# EAGLE board SuperTester-v05 (EAGLE 6.4)
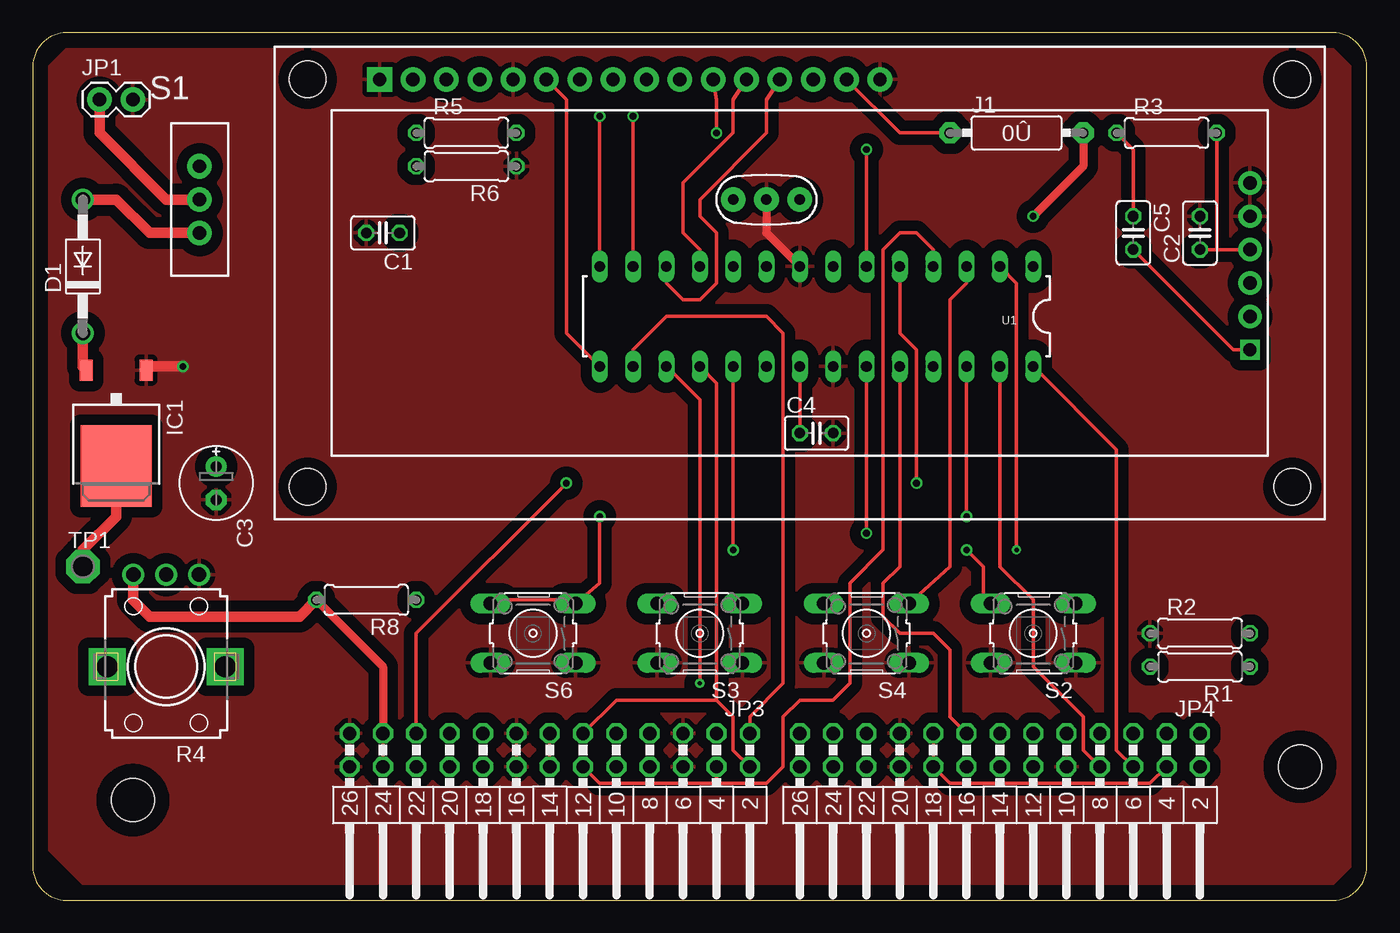
[diagram p0: board, top side]
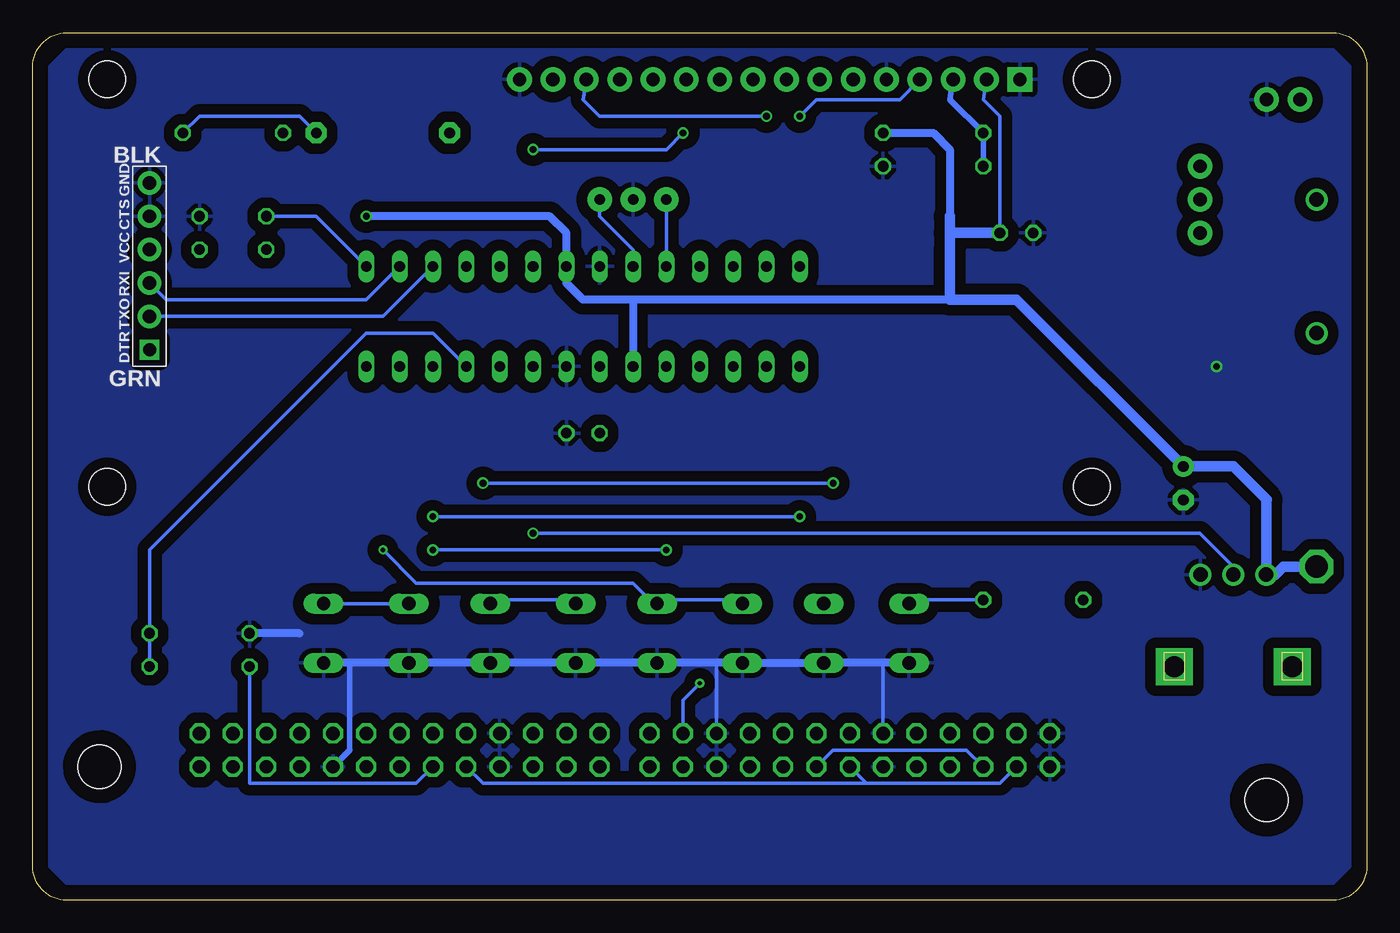
[diagram p1: board, bottom side, seen from below]

Size 101.6 x 66.04 mm. Coordinates in mm from the lower left corner, seen from the top.
Outline: 99.06,66.04 2.54,66.04 arc90 0,63.5 0,2.54 arc90 2.54,0 99.06,0 arc90 101.6,2.54 101.6,63.5 arc90 99.06,66.04
Copper layers (1*16): Top 0.0356mm / dielectric 1.5011mm / Bottom 0.0356mm
Design rules "LaenPCBOrder *": minimum track width 10mil, minimum drill 13mil, track to track 15mil, track to pad 10mil, pad to pad 10mil, via to via 10mil, smd to smd 10mil, copper to edge 15mil, drill to drill 10mil, minimum pad ring 7mil, minimum via ring 7mil, stop-mask expansion 4mil, vias tented up to drill 0mil, thermal gap 15mil
Net classes: 0 default: width 0.152 mm, clearance 0.152 mm; 1 SUPPLY: width 0.61 mm, clearance 0.254 mm

## Footprints (pad centres in the part's own frame; a part is rotated, then mirrored left to right if it is on the bottom)
C025-025X050 = drill 0.813 octagon: 1 -1.27,0; 2 1.27,0
E2,5-6E = drill 0.813 pad 1.575: + -1.27,0 | drill 0.813 pad 1.575 octagon: - 1.27,0
DO41-10 = drill 1.118: A 5.08,0; C -5.08,0
DPACK = smd 1 x 1.6: 1 -2.28,-4.8; 3 2.28,-4.8 | smd 5.4 x 6.2: 2 0,2.5
0R/10 = drill 0.813 pad 1.6 octagon: 1 -5.08,0; 2 5.08,0
1X02 = drill 1.016 pad 1.88: 1 0,0; 2 2.54,0
FTDI_DEVICE_SIDE = drill 1 square: P$1 -6.35,0 | drill 1.016 pad 1.778: P$2 -3.81,0; P$3 -1.27,0; P$4 1.27,0; P$5 3.81,0; P$6 6.35,0
MA13-2W = drill 1.016 octagon: 1 -15.24,-1.27; 2 -15.24,1.27; 3 -12.7,-1.27; 4 -12.7,1.27; 5 -10.16,-1.27; 6 -10.16,1.27; 7 -7.62,-1.27; 8 -7.62,1.27; 9 -5.08,-1.27; 10 -5.08,1.27; 11 -2.54,-1.27; 12 -2.54,1.27; 13 0,-1.27; 14 0,1.27; 15 2.54,-1.27; 16 2.54,1.27; 17 5.08,-1.27; 18 5.08,1.27; 19 7.62,-1.27; 20 7.62,1.27; 21 10.16,-1.27; 22 10.16,1.27; 23 12.7,-1.27; 24 12.7,1.27; 25 15.24,-1.27; 26 15.24,1.27
0207/7 = drill 0.813 octagon: 1 -3.81,0; 2 3.81,0
EVUF = drill 1.1 pad 1.676: 1 -2.5,-7; 2 0,-7; 3 2.5,-7 | drill 1.6 pad 2.8 square: M1 4.5,0; M2 -4.5,0
SWITCH-SPDT = drill 1.016 pad 1.88: 1 0,2.54; 2 0,0; 3 0,-2.54
B3F-10XX = drill 1.016 long: 1 -3.251,2.261; 2 3.251,2.261; 3 -3.251,-2.261; 4 3.251,-2.261
STAND-OFF = hole 3.302: 0,0
P1-17 = drill 1.702 pad 2.54 octagon: TP 0,0
DIL28-3 = drill 0.813 long: 1 -16.51,-3.81; 2 -13.97,-3.81; 3 -11.43,-3.81; 4 -8.89,-3.81; 5 -6.35,-3.81; 6 -3.81,-3.81; 7 -1.27,-3.81; 8 1.27,-3.81; 9 3.81,-3.81; 10 6.35,-3.81; 11 8.89,-3.81; 12 11.43,-3.81; 13 13.97,-3.81; 14 16.51,-3.81; 15 16.51,3.81; 16 13.97,3.81; 17 11.43,3.81; 18 8.89,3.81; 19 6.35,3.81; 20 3.81,3.81; 21 1.27,3.81; 22 -1.27,3.81; 23 -3.81,3.81; 24 -6.35,3.81; 25 -8.89,3.81; 26 -11.43,3.81; 27 -13.97,3.81; 28 -16.51,3.81
LCD-16X2 = drill 1.016 pad 1.88 square: 1 -32,15.5 | drill 1.016 pad 1.88: 2 -29.46,15.5; 3 -26.92,15.5; 4 -24.38,15.5; 5 -21.84,15.5; 6 -19.3,15.5; 7 -16.76,15.5; 8 -14.22,15.5; 9 -11.68,15.5; 10 -9.14,15.5; 11 -6.6,15.5; 12 -4.06,15.5; 13 -1.52,15.5; 14 1.02,15.5; 15 3.56,15.5; 16 6.1,15.5 | hole 2.8: -37.5,15.5; -37.5,-15.5; 37.5,15.5; 37.5,-15.5
RESONATOR-PTH = drill 0.8 pad 1.88: 1 -2.54,0; 2 0,0; 3 2.54,0

## Placement (x,y rotation side)
C1  100nF  [C025-025X050]  26.67,50.8 180 top
C2  100nF  [C025-025X050]  88.9,50.8 90 top
C3  10uF  [E2,5-6E]  13.97,31.75 270 top
C4  100nF  [C025-025X050]  59.69,35.56 0 top
C5  100nF  [C025-025X050]  83.82,50.8 270 top
D1  1N4004  [DO41-10]  3.81,48.26 90 top
FRAME1  FRAME-LETTER  [CREATIVE_COMMONS]  27.94,69.85 0 top  (outside the outline)
IC1  MC33269D-5.0  [DPACK]  6.35,35.56 180 top
J1  0  [0R/10]  74.93,58.42 0 top
JP1  1X2 Header  [1X02]  5.08,60.96 0 top
JP2  FTDI_DEVICE  [FTDI_DEVICE_SIDE]  92.71,48.26 90 bottom
JP3  2X13 Rght Angle Hdr  [MA13-2W]  39.37,11.43 180 top
JP4  2X13 Rght Angle Hdr  [MA13-2W]  73.66,11.43 180 top
R1  24K  [0207/7]  88.9,17.78 180 top
R2  1K  [0207/7]  88.9,20.32 0 top
R3  10K  [0207/7]  86.36,58.42 0 top
R4  10K  [EVUF]  10.16,17.78 180 top
R5  2.4K  [0207/7]  33.02,58.42 0 top
R6  510  [0207/7]  33.02,55.88 180 top
R8  10K  [0207/7]  25.4,22.86 180 top
S1  POWER  [SWITCH-SPDT]  12.7,53.34 0 top
S2  B3F-1070  [B3F-10XX]  76.2,20.32 180 top
S3  B3F-1070  [B3F-10XX]  50.8,20.32 180 top
S4  B3F-1070  [B3F-10XX]  63.5,20.32 180 top
S6  B3F-1070  [B3F-10XX]  38.1,20.32 180 top
STANDOFF1  STAND-OFF  [STAND-OFF]  7.62,7.62 0 top
STANDOFF2  STAND-OFF  [STAND-OFF]  96.52,10.16 0 top
TP1  TPPAD1-17  [P1-17]  3.81,25.4 0 top
U1  ATMEGA328P_PDIP  [DIL28-3]  59.69,44.45 180 top
U2  LCD-16X2SILK  [LCD-16X2]  58.42,46.99 0 top
Y1  16MHz  [RESONATOR-PTH]  55.88,53.34 180 top

## Library data of the parts
C1 C2 C4 C5 = resistor; PARTNO: SR295E104MAR
C3 = resistor; PARTNO: TAP106M025SCS
D1 = diode; PARTNO: 1N4004GP-E3/54
FRAME1 = SparkFun-Aesthetics
IC1 = linear; PARTNO: MC33269DTRK-5.0G
J1 = jumper
JP1 = SparkFun-Connectors; PARTNO: 640456-2
JP2 = SparkFun-Connectors; PARTNO: 826926-6
JP3 JP4 = con-lstb; OC_FARNELL: unknown; OC_NEWARK: unknown; PARTNO: 1-826634-3
R1 = resistor; PARTNO: CFR-12JB-52-24K
R2 = resistor; PARTNO: CFR-12JB-52-1K
R3 R8 = resistor; PARTNO: CFR-12JB-52-10K
R4 = pot; PARTNO: EVU-F3AF30B14
R5 = resistor; PARTNO: CFR-12JB-52-2K4
R6 = resistor; PARTNO: CFR-12JB-52-510R
S1 = SparkFun-Electromechanical; PARTNO: EG1218
S2-S4 S6 = switch-omron; MPN: B3F-1000; OC_FARNELL: 176432; OC_NEWARK: 36M3542; PARTNO: B3F-1070
STANDOFF1 STANDOFF2 = SparkFun-Electromechanical
TP1 = testpad
U1 = SparkFun-DigitalIC; PARTNO: A000048
U2 = SparkFun-Displays; PARTNO: LCM-S01602DSF/A
Y1 = SparkFun-FreqCtrl; PARTNO: CSTLS16M0X53-B0

## Nets
ACT1: JP2.P$3 S3.3 S3.4 U1.2
ACT2: JP2.P$2 S4.3 S4.4 U1.3
AIN0: R4.2 U1.23
AIN1: JP4.15 U1.24
AIN2: R1.1 R2.2 U1.25
AREF: C4.1 U1.21
BRIGHT: J1.1 U2.15
CON: R5.1 R6.2 U2.3
D4: U1.6 U2.11
D5: U1.11 U2.12
D6: U1.12 U2.13
D7: U1.13 U2.14
DIN1: JP3.4 JP3.12 JP3.22 U1.4
DIN2: JP3.2 JP3.11 U1.18
EN: U1.15 U2.6
GND: C1.2 C2.2 C3.- C4.2 IC1.1 JP1.2 JP2.P$5 JP2.P$6 JP3.5 JP3.6 JP3.15 JP3.16 JP3.25 JP3.26 JP4.10 JP4.19 JP4.20 R2.1 R4.1 R6.1 S2.1 S2.2 S3.1 S3.2 S4.1 S4.2 S6.1 S6.2 U1.8 U1.22 U2.1 U2.5 U2.16 Y1.2
NEXT: S2.3 S2.4 U1.19
PREV: R8.1 S6.3 S6.4 U1.26
PWMOUT: JP3.21 U1.5
RESET: C5.1 R3.1 U1.1
RS: U1.14 U2.4
RST#: C5.2 JP2.P$1
SCALED_AIN: JP4.16 R1.2
SCL: JP4.6 U1.28
SDA: JP4.8 U1.27
SPIKE_FWD: JP3.1 U1.16
SPIKE_REV: JP3.3 U1.17
V_BATT: JP1.1 S1.2
VB: D1.A S1.3
VCC: C1.1 C2.1 C3.+ IC1.2 J1.2 JP2.P$4 JP3.13 JP3.14 JP3.23 JP3.24 JP4.4 JP4.17 JP4.18 R3.2 R4.3 R5.2 R8.2 TP1.TP U1.7 U1.20 U2.2
VIN: D1.C IC1.3
XTAL1: U1.9 Y1.1
XTAL2: U1.10 Y1.3

## Tracks (layer width: path | path; a pad name or v marks a point on that pad's centre or on a via)
ACT1  (via drill 0.33)
  Top 0.254: U1.2 74.93,46.99 v74.93,26.67
  Bottom 0.254: U1.2 76.2,45.72 91.44,45.72 JP2.P$3 | S3.4 48.26,22.86 53.34,22.86 S3.3 54.61,22.86 55.88,24.13 72.39,24.13 v74.93,26.67
ACT2
  Top 0.254: S4.3 69.85,25.4 69.85,45.72 71.12,46.99 U1.3
  Bottom 0.254: U1.3 74.93,44.45 JP2.P$2 | S4.4 60.96,22.86 66.04,22.86 S4.3
AIN0  (via drill 0.51)
  Top 0.254: v63.5,27.94 U1.23
  Bottom 0.254: R4.2 10.16,25.4 12.7,27.94 v63.5,27.94
AIN1
  Top 0.254: U1.24 66.04,25.4 64.77,24.13 64.77,21.59 66.04,20.32 68.58,20.32 69.85,19.05 69.85,13.97 JP4.15
AIN2
  Bottom 0.254: U1.25 71.12,43.18 76.2,43.18 92.71,26.67 R2.2 R1.1
AREF
  Top 0.254: U1.21 C4.1
BRIGHT
  Top 0.254: 62.23,62.23 U2.15 66.04,58.42 J1.1
CON
  Bottom 0.406: R6.2 R5.1 31.75,60.96 U2.3
D4  (via drill 0.51)
  Top 0.254: U1.6 v63.5,57.15 | v52.07,58.42 52.07,60.96 U2.11
  Bottom 0.254: v63.5,57.15 53.34,57.15 v52.07,58.42
D5
  Top 0.254: U2.12 53.34,60.96 53.34,58.42 49.53,54.61 49.53,50.8 50.8,49.53 U1.11
D6
  Top 0.254: U1.12 48.26,46.99 49.53,45.72 50.8,45.72 52.07,46.99 52.07,50.8 50.8,52.07 50.8,53.34 55.88,58.42 55.88,60.96 U2.13
D7  (via drill 0.51)
  Top 0.254: U1.13 v45.72,59.69
  Bottom 0.254: v45.72,59.69 58.42,59.69 59.69,60.96 U2.14
DIN1
  Top 0.254: 52.07,8.89 55.88,8.89 57.15,10.16 57.15,13.97 58.42,15.24 60.96,15.24 62.23,16.51 62.23,24.13 64.77,26.67 64.77,49.53 66.04,50.8 67.31,50.8 68.58,49.53 U1.4 | JP3.4 52.07,8.89 | JP3.12 43.18,8.89 52.07,8.89
  Bottom 0.254: JP3.22 30.48,11.43 40.64,11.43 JP3.12
DIN2
  Top 0.254: U1.18 52.07,39.37 52.07,15.24 | 52.07,15.24 53.34,13.97 53.34,11.43 JP3.2 | JP3.11 44.45,15.24 52.07,15.24
EN
  Top 0.254: U1.15 40.64,43.18 40.64,60.96 39.37,62.23 U2.6
GND  (via drill 0.51)
  Top 0.254: JP3.15 JP3.16
  Top 0.61: U1.8 55.88,50.8 Y1.2 | IC1.1 8.91,40.64
  Top 0.813: 8.91,40.64 v11.43,40.64
  Bottom 0.254: 36.83,18.06 JP3.15 | 49.53,18.06 JP3.5
  Bottom 0.406: JP4.10 77.47,11.43 77.47,18.06
  Bottom 0.61: S6.2 36.83,18.06 S6.1 S3.2 49.53,18.06 S3.1 S4.2 S4.1 S2.2 77.47,18.06 S2.1 | 81.28,20.32 R2.1
  pour Bottom (isolate 0.813): 1.27,63.5 2.54,64.77 99.06,64.77 100.33,63.5 100.33,2.54 99.06,1.27 2.54,1.27 1.27,2.54
  pour Top (isolate 0.813): 3.81,1.27 1.27,3.81 1.27,63.5 2.54,64.77 99.06,64.77 100.33,63.5 100.33,2.54 99.06,1.27
NEXT  (via drill 0.51)
  Top 0.254: U1.19 v53.34,26.67 | v71.12,26.67 72.39,25.4 72.39,22.86 S2.4
  Bottom 0.254: S2.3 S2.4 | v71.12,26.67 v53.34,26.67
PREV  (via drill 0.51)
  Top 0.254: S6.4 35.56,22.86 40.64,22.86 S6.3 43.18,24.13 v43.18,29.21 | v71.12,29.21 U1.26
  Bottom 0.254: v43.18,29.21 v71.12,29.21 | R8.1 34.29,22.86 S6.4
PWMOUT  (via drill 0.51)
  Top 0.254: U1.5 66.04,43.18 67.31,41.91 v67.31,31.75 | v40.64,31.75 29.21,20.32 JP3.21
  Bottom 0.254: v67.31,31.75 v40.64,31.75
RESET
  Top 0.254: R3.1 83.82,57.15 C5.1
  Bottom 0.254: U1.1 80.01,52.07 C5.1
RS  (via drill 0.51)
  Top 0.254: U1.14 v43.18,59.69
  Bottom 0.254: v43.18,59.69 41.91,60.96 35.56,60.96 U2.4
RST#
  Top 0.254: C5.2 91.44,41.91 JP2.P$1
SCALED_AIN
  Bottom 0.254: JP4.16 72.39,8.89 85.09,8.89 R1.2
SCL
  Top 0.254: U1.28 82.55,34.29 82.55,11.43 JP4.6
SDA
  Top 0.254: U1.27 73.66,25.4 76.2,22.86 76.2,17.78 80.01,13.97 80.01,11.43 JP4.8
SPIKE_FWD
  Top 0.254: JP3.1 54.61,13.97 57.15,16.51 57.15,43.18 55.88,44.45 48.26,44.45 45.72,41.91 U1.16
SPIKE_REV  (via drill 0.33)
  Top 0.254: U1.17 50.8,38.1 v50.8,16.51
  Bottom 0.254: v50.8,16.51 52.07,15.24 JP3.3
V_BATT
  Top 0.813: S1.2 10.16,53.34 5.08,58.42 JP1.1
VB
  Top 0.813: D1.A 6.35,53.34 8.89,50.8 S1.3
VCC  (via drill 0.51)
  Top 0.254: JP2.P$4 90.17,49.53 | 90.17,49.53 C2.1 | 90.17,49.53 R3.2 | JP4.17 JP4.18 69.85,8.89 85.09,8.89 JP4.4 | JP3.13 JP3.14 | JP3.23 JP3.24
  Top 0.61: R8.2 26.67,17.78 JP3.23 | J1.2 80.01,55.88 v76.2,52.07
  Top 0.813: IC1.2 6.35,29.21 3.81,26.67 TP1.TP | R8.2 20.32,21.59 8.89,21.59 7.62,22.86 7.66,22.9 R4.3
  Bottom 0.254: 7.62,24.82 R4.3 | 7.66,30.44 7.62,30.48 | J1.2 81.28,59.69 88.9,59.69 R3.2 | 38.1,8.89 JP3.14 | 38.1,8.89 27.94,8.89 JP3.24 | JP4.18 67.31,8.89 38.1,8.89 | U2.2 29.21,60.96 27.94,59.69 C1.1
  Bottom 0.61: 31.75,45.72 55.88,45.72 | 55.88,45.72 U1.20 | R5.2 33.02,58.42 31.75,57.15 31.75,52.07 | 31.75,46.99 31.75,49.53 | 55.88,45.72 59.69,45.72 60.96,46.99 U1.7 60.96,50.8 62.23,52.07 v76.2,52.07
  Bottom 0.813: 7.62,30.48 10.16,33.02 C3.+ 26.67,45.72 31.75,45.72 31.75,49.53 31.75,50.8 | TP1.TP 6.35,25.4 6.97,24.78 R4.3 7.66,30.44 | 31.75,52.07 31.75,50.8 | C1.1 31.75,50.8
VIN
  Top 0.254: 3.81,40.62 IC1.3
  Top 0.813: D1.C 3.81,40.62
XTAL1
  Bottom 0.254: Y1.1 58.42,52.07 55.88,49.53 U1.9
XTAL2
  Bottom 0.254: Y1.3 U1.10